# Altium PCB WS2812 Xmas Lights.PcbDoc
Units mil, origin at the board's own origin, x right, y up, seen from the top; angles counter-clockwise.
Board outline 3661.42 x 2086.61 mil, 2 copper layers (Top Layer, Bottom Layer), stack 65.792 mil thick; 29 components, 25 nets, 107 pads, 14 vias.
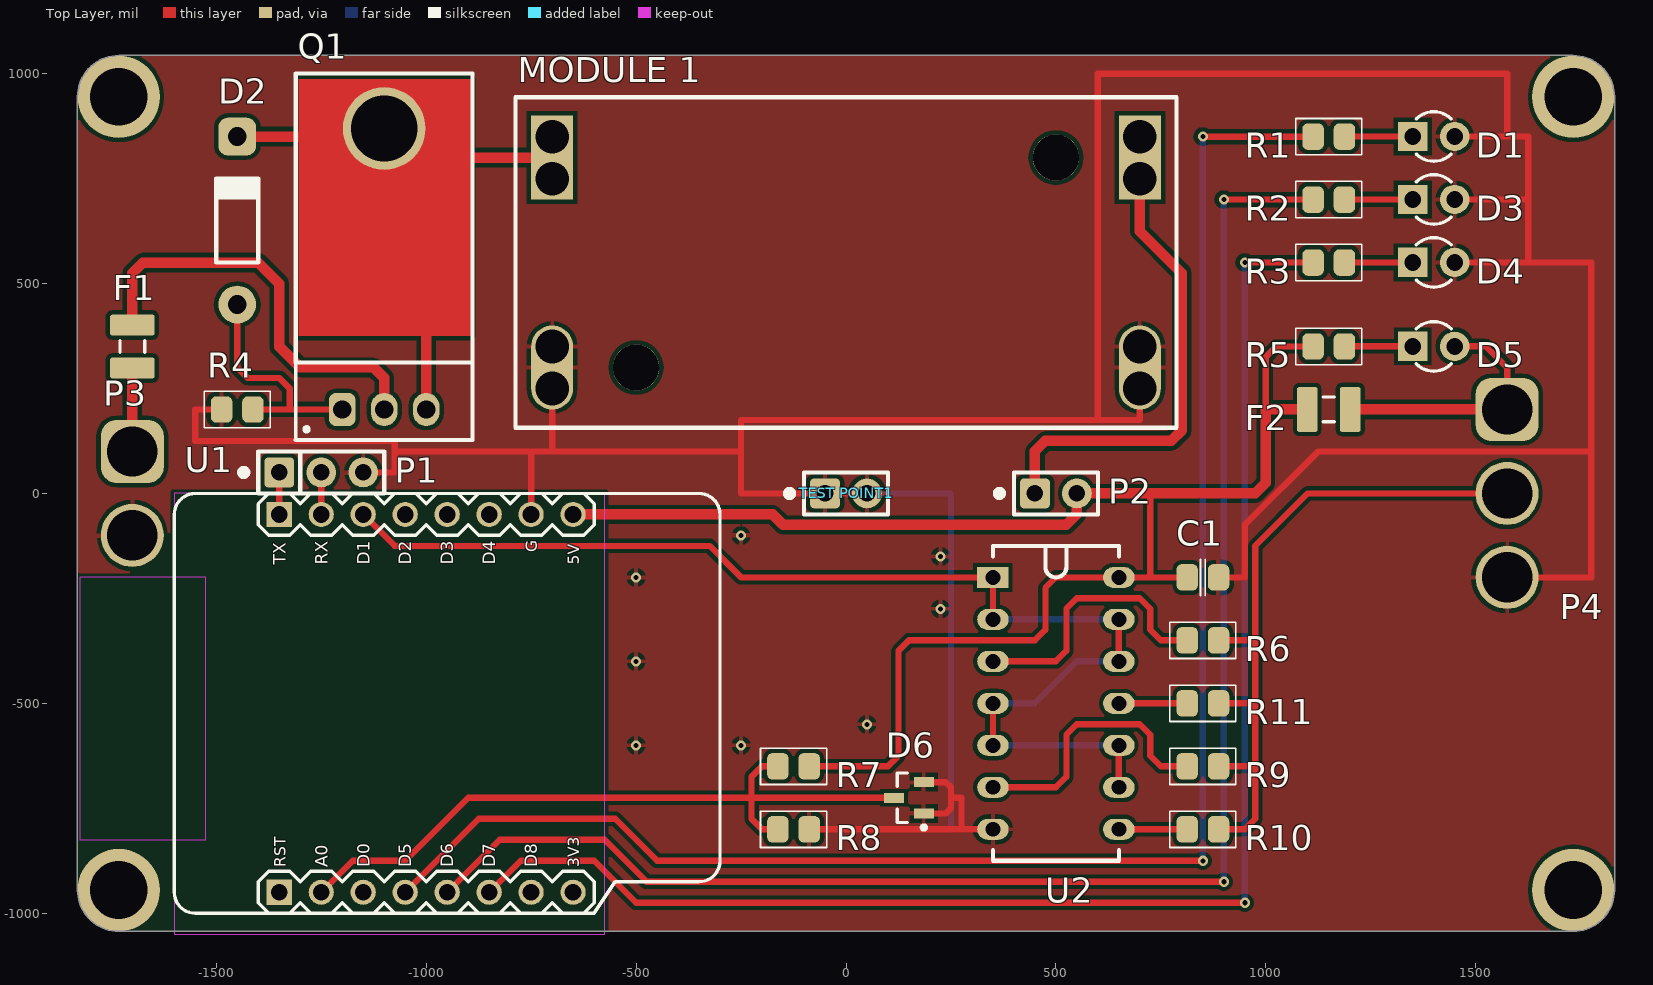
[diagram p0: Top Layer view]
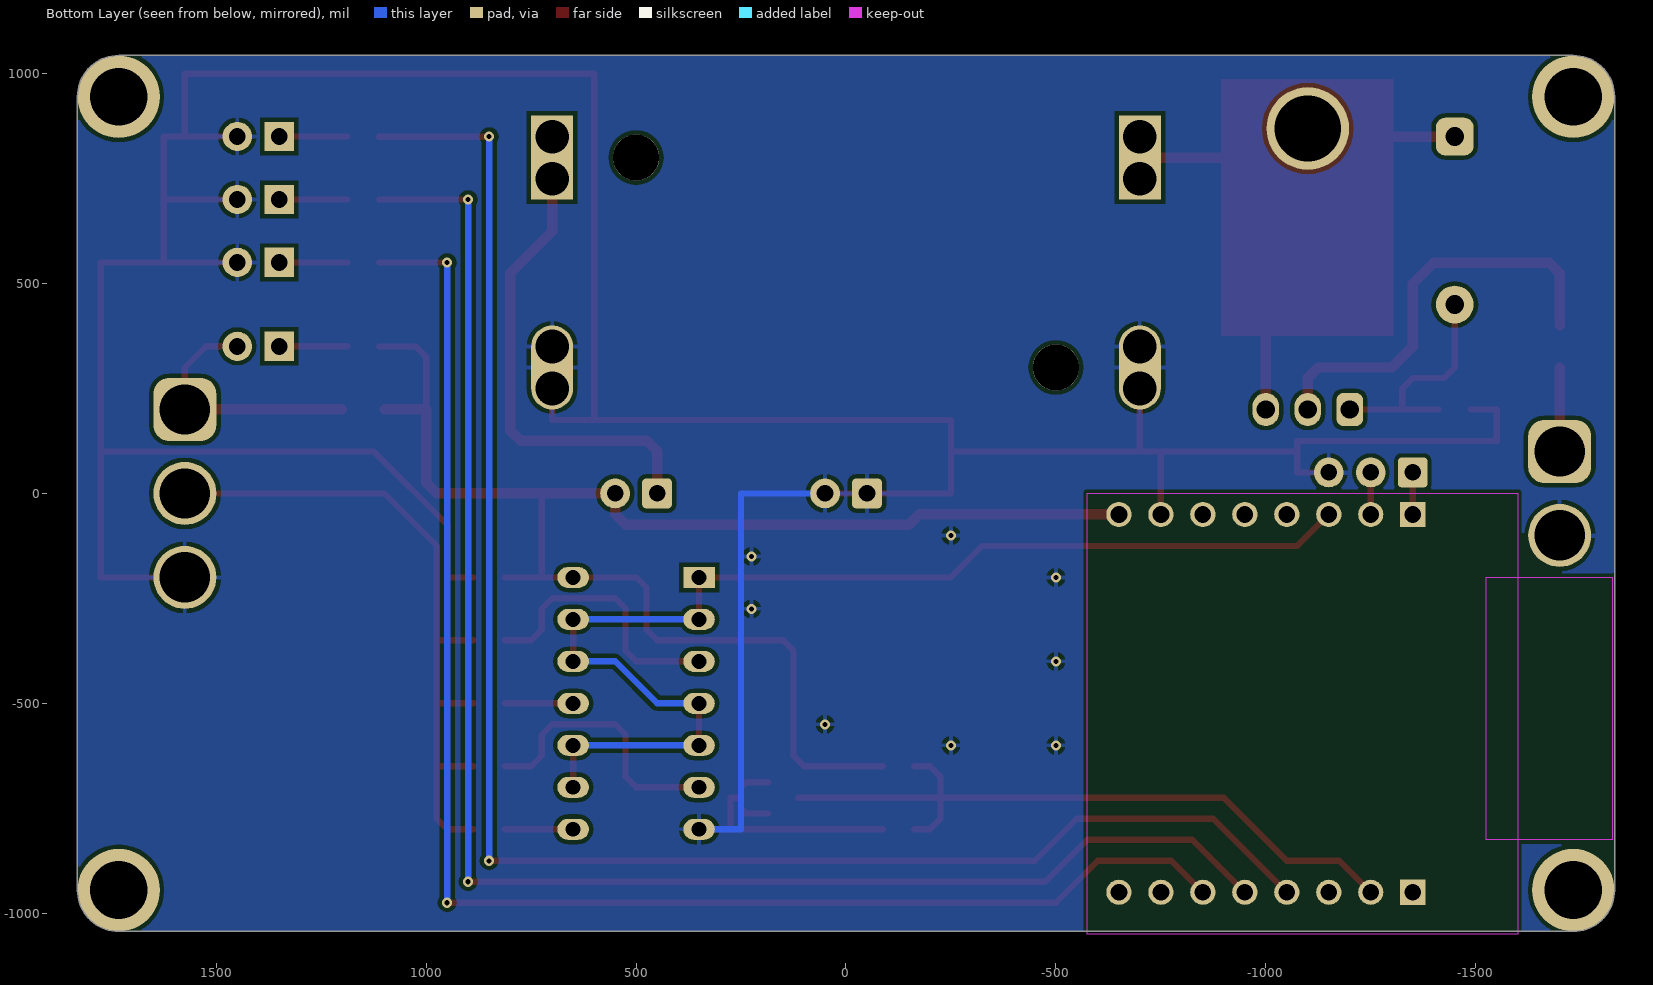
[diagram p1: Bottom Layer view, seen from below]
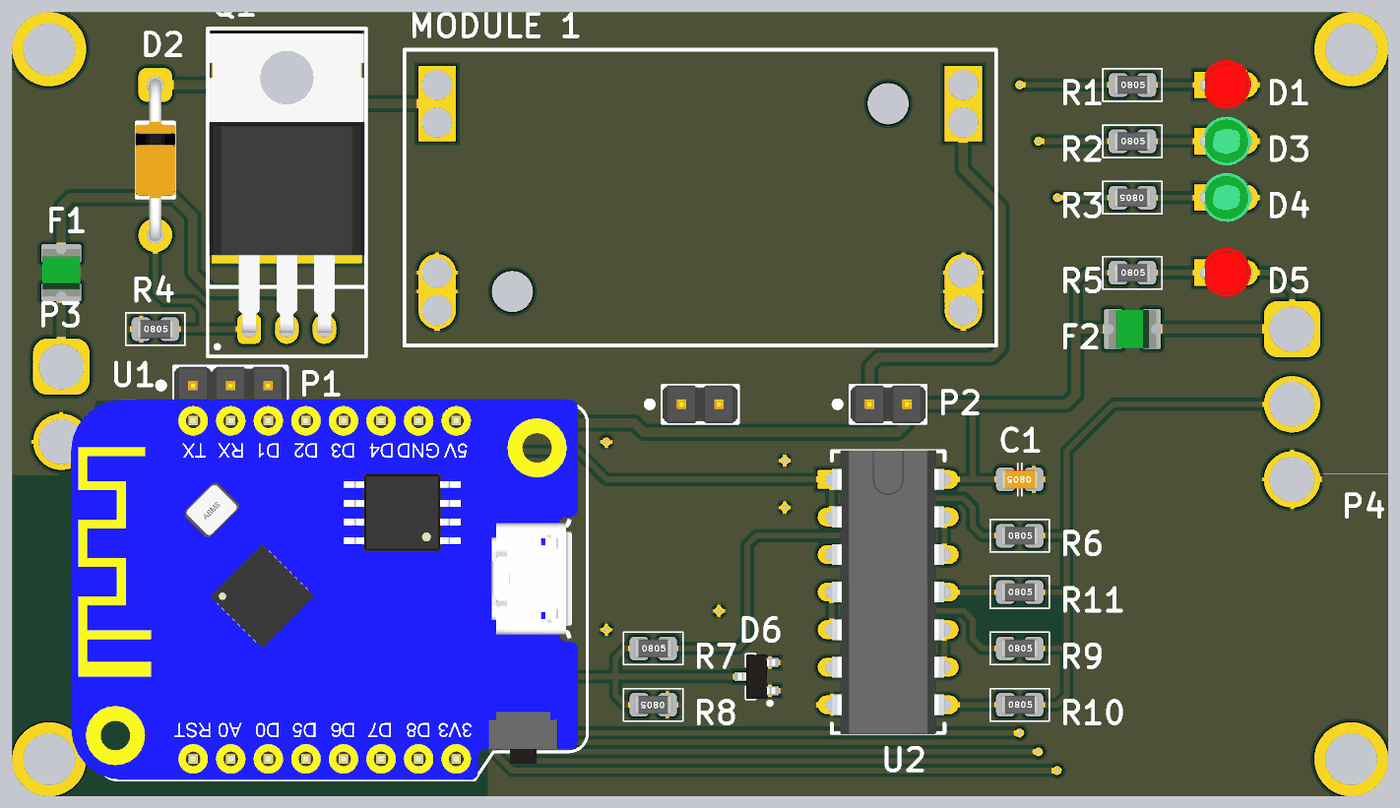
[diagram p2: 3D render of the assembled board from above, using the file's embedded part models]

## Layer stack, top to bottom
Top Solder: solder mask 0.4, Solder Resist, Dk 3.5
Top Layer: signal copper 1.4
Dielectric 1: dielectric 62.9921, FR-4, Dk 4.8
Bottom Layer: signal copper 1.4
Bottom Solder: solder mask 0.4, Solder Resist, Dk 3.5

## Board outline
-1830.71,-944.88 ccw(c-1732.28,-944.88) -1732.28,-1043.31 1732.28,-1043.31 ccw(c1732.28,-944.88) 1830.71,-944.88 1830.71,944.88 ccw(c1732.28,944.88) 1732.28,1043.31 -1732.28,1043.31 ccw(c-1732.28,944.88) -1830.71,944.88

## Design rules (kind name [scope] priority, off if disabled: settings)
Clearance [All] p1: gap=10
MinimumSolderMaskSliver [All] p1 off: minsoldermaskwidth=10
PolygonConnect [All] p1: connectstyle=Relief reliefconductorwidth=10 reliefentries=4 polygonreliefangle="90 Angle" airgapwidth=10
RoomDefinition "WS2812 Driver" [InComponentClass('WS2812 Driver')] p1: confinementstyle=ConfineIn formatcopy=TRUE lockcomponents=FALSE outline -1625,-1875 1625,-1875 1625,1875 -1625,1875
RoutingVias [All] p1: holewidth=12 width=24 viastyle="Through Hole" minholewidth=12 minwidth=24 maxholewidth=28 maxwidth=50
SilkToSilkClearance [All] p1 off: silktosilkclearance=10
SilkToSolderMaskClearance [IsPad] p1 off: minsilkscreentomaskgap=10 clearancetoexposedcopper=TRUE
SolderMaskExpansion [All] p1: expansion=4
Width [All] p1: maxlimit=250 minlimit=8 preferedwidth=10
27 further rules are at their usual default settings.

## Components (designator, comment, footprint, x,y, rotation, side; value= is the part's Value field where it differs from the comment)
C1 "100nF" "CAPACITOR 0805" 850,-200 r180 top
D1 "LED (RED)" "LED(3D) 3MM VERTICAL (RED)" 1400,850 r180 top
D2 "1N4733A" DO-41 -1450,650 r0 top
D3 "LED (GREEN)" "LED(3D) 3MM VERTICAL (GREEN)" 1400,700 r180 top
D4 "LED (BLUE)" "LED(3D) 3MM VERTICAL (GREEN)" 1400,550 r180 top
D5 "LED (RED)" "LED(3D) 3MM VERTICAL (RED)" 1400,350 r180 top
D6 "BAV99" SOT23-3L 150,-725 r180 top
F1 "1500mA" "POLYSWITHC 1210" -1700,350 r90 top
F2 "3000mA" "POLYSWITHC 1210" 1150,200 r180 top
"MODULE 1" "3A Buck Module" "3A BUCK" 0,550 r0 top
P1 "DEBUG" "Pin Header 1x3 TH Pitch 2.54mm" -1350,50 r0 top
P2 "5V SET" "Pin Header 1x2 TH Pitch 2.54mm" 450,0 r0 top
P3 "Header 2" "2 FLYING WIRES" -1700,0 r270 top
P4 "Header 3" "3 FLYING WIRES" 1574.8,0 r270 top
Q1 "NDP6020P" "TO-220AB - RIGHT ANGLE" -1100,200 r0 top
R1 "Value" "RESISTOR 0805" 1150,850 r0 top
R2 "Value" "RESISTOR 0805" 1150,700 r0 top
R3 "Value" "RESISTOR 0805" 1150,550 r180 top
R4 "10k" "RESISTOR 0805" -1450,200 r0 top
R5 "Value" "RESISTOR 0805" 1150,350 r0 top
R6 "10R" "RESISTOR 0805" 850,-350 r0 top
R7 "tba" "RESISTOR 0805" -125,-650 r0 top
R8 "1k" "RESISTOR 0805" -125,-800 r180 top
R9 "10R" "RESISTOR 0805" 850,-650 r0 top
R10 "10R" "RESISTOR 0805" 850,-800 r0 top
R11 "10R" "RESISTOR 0805" 850,-500 r0 top
"TEST POINT1" "GND" "Pin Header 1x2 TH Pitch 2.54mm" -50,0 r0 top
U1 "WEMOS D1-MINI" "WEMOS PRO MINI" -1000,-500 r90 top
U2 "7408" DIP-14 500,-500 r0 top

## Footprints (in the part's own frame and the unit in brackets; to place one, negate y for a bottom-side part, rotate by r counter-clockwise, add the part's x,y. Pads: shape width x height; smd on the part's side, far side on the other; paste and mask are expansions set on the pad)
"2 FLYING WIRES" [mil]
  rrect50% 150x150 hole 120 unplated: 1(-100,0)
  round 150 hole 120 unplated: 2(100,0)
"3 FLYING WIRES" [mil]
  rrect50% 150x150 hole 120 unplated: 1(-200,0)
  round 150 hole 120 unplated: 2(0,0) 3(200,0)
"3A BUCK" [mil]
  round 100 hole 80: 1(-700,200) 2(-700,-200) 3(700,-200) 4(700,200)
  rect 100x200 hole 80 copper offset 0,-50: 1(-700,300) 4(700,300)
  oval 100x200 hole 80 copper offset 0,50: 2(-700,-300) 3(700,-300)
  round 110 hole 110 unplated: MOUNT(-500,-250) MOUNT(500,250)
  silkscreen extent -787,-394 787,394
"CAPACITOR 0805" [mm]
  rrect50% 1.3x1.6 smd: 1(-0.95,0) 2(0.95,0)
  silkscreen extent -0.15,-1.1 0.15,1.1, body extent -1.25,-0.62 1.25,0.62, height 0.8
DIP-14 [mm]
  rect 1.905x1.27 hole 0.9: 1(-3.81,7.62)
  oval 1.905x1.27 hole 0.9: 2(-3.81,5.08) 3(-3.81,2.54) 4(-3.81,0) 5(-3.81,-2.54) 6(-3.81,-5.08) 7(-3.81,-7.62) 8(3.81,-7.62) 9(3.81,-5.08) 10(3.81,-2.54) 11(3.81,0) 12(3.81,2.54) 13(3.81,5.08) 14(3.81,7.62)
  silkscreen extent -3.81,-9.53 3.81,9.53, body extent -3.81,-9.6 3.81,9.6, height 4
DO-41 [mil]
  rrect50% 90x90 hole 45 unplated: 1(0,200)
  round 90 hole 45 unplated: 2(0,-200)
  silkscreen extent -50,-100 50,100, body extent -54,-216 54,216, height 117
"LED(3D) 3MM VERTICAL (GREEN)" [mil]
  rect 70x70 hole 40: 1(50.06,-0.28)
  round 70 hole 40: 2(-49.94,-0.28)
  silkscreen extent -42,-59 42,59, body extent -65,-65 61,64, height 196
"LED(3D) 3MM VERTICAL (RED)" [mil]
  rect 70x70 hole 40: 1(50.06,-0.28)
  round 70 hole 40: 2(-49.94,-0.28)
  silkscreen extent -42,-59 42,59, body extent -66,-66 61,64, height 207
"Pin Header 1x2 TH Pitch 2.54mm" [mm] "PinHeader 1x2 TH Pitch 2.54mm"
  rrect25% 1.8x1.8 hole 1: 1(0,0)
  round 1.8 hole 1: 2(2.54,0)
  silkscreen extent -2.3,-1.27 3.81,1.27, body extent -1.27,-1.27 3.81,1.27, height 9.5
"Pin Header 1x3 TH Pitch 2.54mm" [mm] "PinHeader 1x3 TH Pitch 2.54mm"
  rrect25% 1.8x1.8 hole 1: 1(0,0)
  round 1.8 hole 1: 2(2.54,0) 3(5.08,0)
  silkscreen extent -2.3,-1.27 6.35,1.27, body extent -1.27,-1.27 6.35,1.27, height 9.5
"POLYSWITHC 1210" [mm]
  rrect20% 1.25x2.7 smd: 1(-1.3,0) 2(1.3,0)
  silkscreen extent -0.35,-0.75 0.35,0.75, body extent -1.61,-1.29 1.61,1.29, height 0.64
"RESISTOR 0805" [mm]
  rrect50% 1.3x1.6 smd: 1(-0.95,0) 2(0.95,0)
  silkscreen extent -2,-1.1 2,1.1, body extent -1.25,-0.62 1.25,0.62, height 0.8
SOT23-3L [mm] "SOT23, 3-Leads, Body 2.9x1.3mm, Pitch 0.95mm, Lead Span 2.5mm, IPC High Density"
  rect 1.2x0.6 smd: 1(-0.9,0.95) 2(-0.9,-0.95) 3(0.9,0)
  silkscreen extent -1.02,-1.5 0.7,1.92, body extent -1.25,-1.5 1.25,1.5, height 1.12
"TO-220AB - RIGHT ANGLE" [mm] "TO, Thru-Hole, Vertical, Heatsink Mounted; 3 In-Line Leads; Pitch 2.54 mm"
  rrect50% 1.6x2 hole 1.1: 1(-2.54,0)
  oval 1.6x2 hole 1.1: 2(0,0) 3(2.54,0)
  round 5 hole 4 unplated: 3(0,17)
  Top Layer region: -5.2,4.445 5.25,4.445 5.25,20 -5.2,20
  silkscreen extent -5.35,-1.85 5.35,20.32, body extent -5.25,-0.25 5.25,20, height 4.66
"WEMOS PRO MINI" [mil]
  rect 60x60 hole 40: 1(-450,350) 16(450,350)
  round 60 hole 40: 2(-450,250) 3(-450,150) 4(-450,50) 5(-450,-50) 6(-450,-150) 7(-450,-250) 8(-450,-350) 9(450,-350) 10(450,-250) 11(450,-150) 12(450,-50) 13(450,50) 14(450,150) 15(450,250)
  silkscreen extent -500,-700 500,600, body extent -500,-674 512,674, height 391

## Part data
C1: library part Cap, "Capacitor"
D1 D3 D4 D5: library part "LED 3mm RED", "3mm RED LED"
D2: library part DO-41, "1N4733A 5V ZENER DO-41"
D6: "DUAL DIODE, BAV99"
F1 F2: library part "PTC 12V POLYFUSE SMT 1210 1.10A", "PTC 12V POLYFUSE SMT 1210 500mA (1210L110/12WR)"
P1: library part "Header 3", "Header, 3 Pin"
P2 "TEST POINT1": library part "Header 2", "Header, 2-Pin"
P3: "Header, 2-Pin"
P4: "Header, 3 Pin"
Q1: "Trans MOSFET P-CH 20V 24A TO-220AB NDP6020P"
R1 R2 R3 R4 R5 R6 R7 R8 R9 R10 R11: library part Res2, "Resistor"
U1: library part WEMOS
U2: "Quadruple 2-Input Positive-AND Gate"

## Free pads (board coordinates)
  round 10 on Mech4: 1(5082.1,-3582.94) 1(5082.1,-3582.94) 1(5082.62,-3660.05) 1(5082.62,-3660.05) 1(5269.4,-3515.17) 1(5269.4,-3515.17)
  round 196.85 hole 137.8 unplated: MOUNT(-1732.28,-944.88) MOUNT(-1732.28,944.88) MOUNT(1732.28,-944.88) MOUNT(1732.28,944.88)

## Via types
v1: diameter 24, hole 12, Top Layer to Bottom Layer, 14 vias

## Nets (pads, with @x,y where several pads share a name; then routed paths per layer and width w, separated by ;. In a path a pad name is that pad's centre, name@x,y a point inside that pad or via, vN(x,y) a via of type N, cw(c..) or ccw(c..) an arc to the next point about the centre after c; other vN are vias at no path point)
3V3: U1.8
12V: "MODULE 1.1" D2.1 Q1.3 | length 625
  Top Layer w25: D2.1 -1275,850 ; Q1.3@-1000,200 -1000,425 ; -950,800 -725,800
BLUE: R3.2 U1.6 | length 3560.1
  Top Layer w15: U1.6 -775,-875 -600,-875 -500,-975 v1(950,-975) ; v1(950,550) R3.2
  Bottom Layer w15: v1(950,-975) v1(950,550)
GND: "MODULE 1.2" "MODULE 1.3" "TEST POINT1.1" "TEST POINT1.2" C1.1 D1.2 D3.2 D4.2 D6.1 D6.2 P1.3 P3.2 P4.3 R4.1 R8.1 U1.10 U2.7 | length 10174.7
  Top Layer w15: R4.1 -1550,200 -1550,125 -1075,125 -1075,100 ; P1.3 -1075,50 -1075,100 ; U1.10 -750,100 ; -700,250 -700,100 ; R8.1 275,-800 ; 50,0 -50,0 -250,0 -250,100 ; D6.1 237.6,-762.4 250,-750 250,-725 ; D6.2 237.6,-687.6 250,-700 250,-725 ; U2.7 275,-800 ; 700,250 700,175 600,175 ; C1.1 950,-200 950,-75 1125,100 1775,100 ; D4.2 1450.22,550 1625,550 ; D3.2 1624.72,700.28 ; D1.2 1575,850.28 ; P4.3 1775,-200 1775,100 ; -1075,100 -750,100 ; -750,100 -700,100 ; -700,100 -250,100 ; -250,100 -250,175 600,175 ; 250,-725 275,-725 275,-800 ; 600,175 600,1000 1575,1000 1575,850.28 ; 1575,850.28 1624.72,850.28 1625,850 1625,550 ; 1625,550 1775,550 1775,100
  Bottom Layer w15: 50,0 250,0 250,-800 U2.7
  other v1: -500,-600 -250,-600 50,-550 -500,-400 225,-275 -500,-200 225,-150 -250,-100
GREEN: R2.1 U1.5 | length 3780.8
  Top Layer w15: U1.5 -825,-825 -575,-825 -475,-925 v1(900,-925) ; v1(900,700) R2.1
  Bottom Layer w15: v1(900,-925) v1(900,700)
NetD1_1: D1.1 R1.2 | length 162.3
  Top Layer w15: R1.2@1187.69,850.28 D1.1
NetD2_2: D2.2 Q1.1 R4.2 | length 558.3
  Top Layer w15: D2.2 -1450,300 -1425,275 -1350,275 -1325,250 -1325,200 ; R4.2 -1325,200 ; Q1.1 -1325,200
NetD3_1: D3.1 R2.2 | length 162.3
  Top Layer w15: R2.2@1187.69,700.28 D3.1
NetD4_1: D4.1 R3.1 | length 162.3
  Top Layer w15: R3.1 D4.1@1349.66,550
NetD5_1: D5.1 R5.2 | length 162.3
  Top Layer w15: R5.2@1187.69,350.28 D5.1
NetD5_2: D5.2 F2.1 P4.1 | length 619.2
  Top Layer w15: D5.2 1524.32,350.28 1574.8,299.8 P4.1
  Top Layer w25: F2.1 P4.1
NetF1_1: F1.1 P3.1 | length 198.8
  Top Layer w25: P3.1 F1.1
NetF1_2: F1.2 Q1.2 | length 1011
  Top Layer w25: F1.2 -1700,525 -1675,550 -1400,550 -1350,500 -1350,350 -1300,300 -1125,300 -1100,275 Q1.2
"NetMODULE 1_4": "MODULE 1.4" P2.1 | length 1112.1
  Top Layer w15: P2.1 P2.1@450,25
  Top Layer w25: P2.1@450,25 450,100 475,125 775,125 800,150 800,525 700,625 700,750
NetR6_1: R6.1 U2.3 | length 654
  Top Layer w15: U2.3 500,-400 525,-375 525,-275 550,-250 700,-250 725,-275 725,-325 750,-350 R6.1
NetR9_1: R9.1 U2.6 | length 654
  Top Layer w15: U2.6 500,-700 525,-675 525,-575 550,-550 700,-550 725,-575 725,-625 750,-650 R9.1
NetR10_1: R10.1 U2.8 | length 162.6
  Top Layer w15: U2.8 R10.1
NetR11_1: R11.1 U2.11 | length 162.6
  Top Layer w15: U2.11 R11.1
RED: R1.1 U1.4 | length 4001.5
  Top Layer w15: U1.4 -875,-775 -550,-775 -450,-875 v1(850,-875) ; v1(850,850) R1.1
  Bottom Layer w15: v1(850,-875) v1(850,850)
RXDATA: P1.2 U1.15 | length 100
  Top Layer w15: U1.15 P1.2
TXDATA: P1.1 U1.16 | length 100
  Top Layer w15: U1.16 P1.1
V+: D6.3 R7.1 R8.2 U1.2 | length 1703.7
  Top Layer w15: U1.2 -1175,-875 -1050,-875 -900,-725 -225,-725 ; R8.2 -200,-800 -225,-775 -225,-725 ; R7.1 -200,-650 -225,-675 -225,-725 ; D6.3 -225,-725
VCC: C1.2 F2.2 P2.2 R5.1 R7.2 U1.9 U2.14 | length 3744.5
  Top Layer w15: R7.2 100,-650 125,-625 125,-375 150,-350 450,-350 475,-325 475,-225 500,-200 U2.14 725,-200 ; 725,0 725,-200 ; C1.2 725,-200 ; 1000,200 1000,325 1025,350 R5.1
  Top Layer w25: U1.9 -175,-50 -150,-75 525,-75 550,-50 P2.2 725,0 975,0 1000,25 1000,200 F2.2
WS_DATA: U1.14 U2.1 U2.2 U2.4 U2.5 U2.9 U2.10 U2.12 U2.13 | length 2903.5
  Top Layer w15: U1.14 -1075,-125 -325,-125 -250,-200 U2.1 U2.2 ; U2.5 U2.4 ; U2.9 U2.10 ; U2.12 U2.13
  Bottom Layer w15: U2.5 U2.10 ; U2.4 450,-500 550,-400 575,-400 U2.12 ; U2.2 U2.13
WS_DRIVE: P4.2 R6.2 R9.2 R10.2 R11.2 | length 1662.3
  Top Layer w15: R10.2 950,-800 975,-775 975,-650 ; R9.2 975,-650 ; R11.2 975,-500 ; R6.2 975,-350 ; P4.2 1100,0 975,-125 975,-350 ; 975,-650 975,-500 ; 975,-500 975,-350
pads on no net: "MODULE 1.MOUNT" U1.1 U1.3 U1.7 U1.11 U1.12 U1.13

## Polygon pours and split planes (outlines as drawn)
GND on Top Layer "Top Layer-No Net" (solid, remove dead copper, pour order 4): -1830.71,-944.88 ccw(c-1732.28,-944.88) -1732.28,-1043.31 1732.28,-1043.31 ccw(c1732.28,-944.88) 1830.71,-944.88 1830.71,944.88 ccw(c1732.28,944.88) 1732.28,1043.31 -1732.28,1043.31 ccw(c-1732.28,944.88) -1830.71,944.88
GND on Bottom Layer "Top Layer-No Net1" (solid, pour order 5): -1830.71,-944.88 ccw(c-1732.28,-944.88) -1732.28,-1043.31 1732.28,-1043.31 ccw(c1732.28,-944.88) 1830.71,-944.88 1830.71,944.88 ccw(c1732.28,944.88) 1732.28,1043.31 -1732.28,1043.31 ccw(c-1732.28,944.88) -1830.71,944.88

## Keep-outs
Keep-Out Layer:
  rectangle: -1825,-825 -1525,-200
  rectangle: -1600,-1050 -575,0

## Silkscreen, mask and mechanical layers (free items; w line width, h text height)
Top Solder:
  rectangle: -1300,375 -900,1000
Mechanical 1:
  circle w7.87: c1732.28,-944.88 r51.18
  circle w7.87: c-1732.28,944.88 r51.18
  circle w7.87: c-1732.28,-944.88 r51.18
  circle w7.87: c1732.28,944.88 r51.18
  lines w7.87: -1801.18,-944.88 -1732.28,-944.88 ; -1801.18,944.88 -1732.28,944.88 ; -1732.28,-1013.78 -1732.28,-944.88 ; -1732.28,-875.98 -1732.28,-944.88 ; -1732.28,875.98 -1732.28,944.88 ; -1732.28,1013.78 -1732.28,944.88 ; -1663.39,-944.88 -1732.28,-944.88 ; -1663.39,944.88 -1732.28,944.88 ; 1663.39,-944.88 1732.28,-944.88 ; 1663.39,944.88 1732.28,944.88 ; 1732.28,-1013.78 1732.28,-944.88 ; 1732.28,-875.98 1732.28,-944.88 ; 1732.28,875.98 1732.28,944.88 ; 1732.28,1013.78 1732.28,944.88 ; 1801.18,-944.88 1732.28,-944.88 ; 1801.18,944.88 1732.28,944.88 ; -1830.71,-944.88 ccw(c-1732.28,-944.88) -1732.28,-1043.31 1732.28,-1043.31 ccw(c1732.28,-944.88) 1830.71,-944.88 1830.71,944.88 ccw(c1732.28,944.88) 1732.28,1043.31 -1732.28,1043.31 ccw(c-1732.28,944.88) -1830.71,944.88 -1830.71,-944.88
Mechanical 4:
  drawing of 654 lines, arcs and shapes, not listed
  text "1" at -4645.67,3996.06 h60
  text "2" at -1377.95,3996.06 h60
  text "3" at 1574.8,3996.06 h60
  text "4" at 4389.76,3996.06 h60
  text "A" at -5767.72,3090.55 h60
  text "A" at 5728.35,3090.55 h60
  text "B" at -5787.4,1003.94 h60
  text "B" at 5708.66,1003.94 h60
  text "C" at -5767.72,-1122.05 h60
  text "C" at 5728.35,-1122.05 h60
  text "D" at -5767.72,-3248.03 h60
  text "D" at 5728.35,-3248.03 h60
  text "LOW COST LABS" at 2696.85,-3307.09 h177.17
  text "TITLE: TITLE NAME" at 1377.95,-3523.62 h177.17
  text "ludzinc.blogspot.com.au" at 3759.84,-3562.99 h98.43
  text "SIZE: A4" at 1377.95,-3700.79 h177.17
  text "Revison x.xx" at 2992.13,-3700.79 h78.74
  text "www.lowcostlabs.com.au" at 3740.16,-3700.79 h98.43
  text "DATE:" at 1377.95,-3818.9 h78.74
  text ".Print_Date" at 1614.17,-3818.9 h78.74
  text "SHEET 1 of 1" at 2992.13,-3818.9 h78.74
  text "FILE:" at 1377.95,-3917.32 h78.74
  text ".Pcb_File_Name" at 1614.17,-3917.32 h78.74
  text "S" at -5649.61,-3937.01 h590.55
  text "1" at -4645.67,-4055.12 h60
  text "2" at -1377.95,-4055.12 h60
  text "3" at 1574.8,-4055.12 h60
  text "4" at 4389.76,-4055.12 h60

## Text inside footprints (layer, text, board x,y; h text height)
U1: Top Overlay "D0" at -1135,-890 h29.75 r90; Top Overlay "D7" at -835,-890 h29.75 r90; Top Overlay "D8" at -735,-890 h29.75 r90; Top Overlay "3V3" at -635,-890 h27.2 r90; Top Overlay "A0" at -1235,-890 h29.75 r90; Top Overlay "D6" at -935,-890 h29.75 r90; Top Overlay "D5" at -1035,-890 h29.75 r90; Top Overlay "5V" at -635,-170 h27.2 r90; Top Overlay "RST" at -1335,-890 h27.2 r90; Top Overlay "G" at -735,-140 h27.2 r90; Top Overlay "D3" at -935,-170 h29.75 r90; Top Overlay "TX" at -1335,-170 h29.75 r90; Top Overlay "RX" at -1235,-170 h29.75 r90; Top Overlay "D1" at -1135,-170 h29.75 r90; Top Overlay "D2" at -1035,-170 h29.75 r90; Top Overlay "D4" at -835,-170 h29.75 r90